# Altium PCB PMS.PcbDoc (part 2 of 2)
Units mil, origin at the board's own origin, x right, y up, seen from the top; angles counter-clockwise.
Board outline 4750 x 3250 mil, 4 copper layers (Top Layer, Layer 1, Layer 2, Bottom Layer), stack 23.756 mil thick; 171 components, 112 nets, 581 pads, 159 vias.
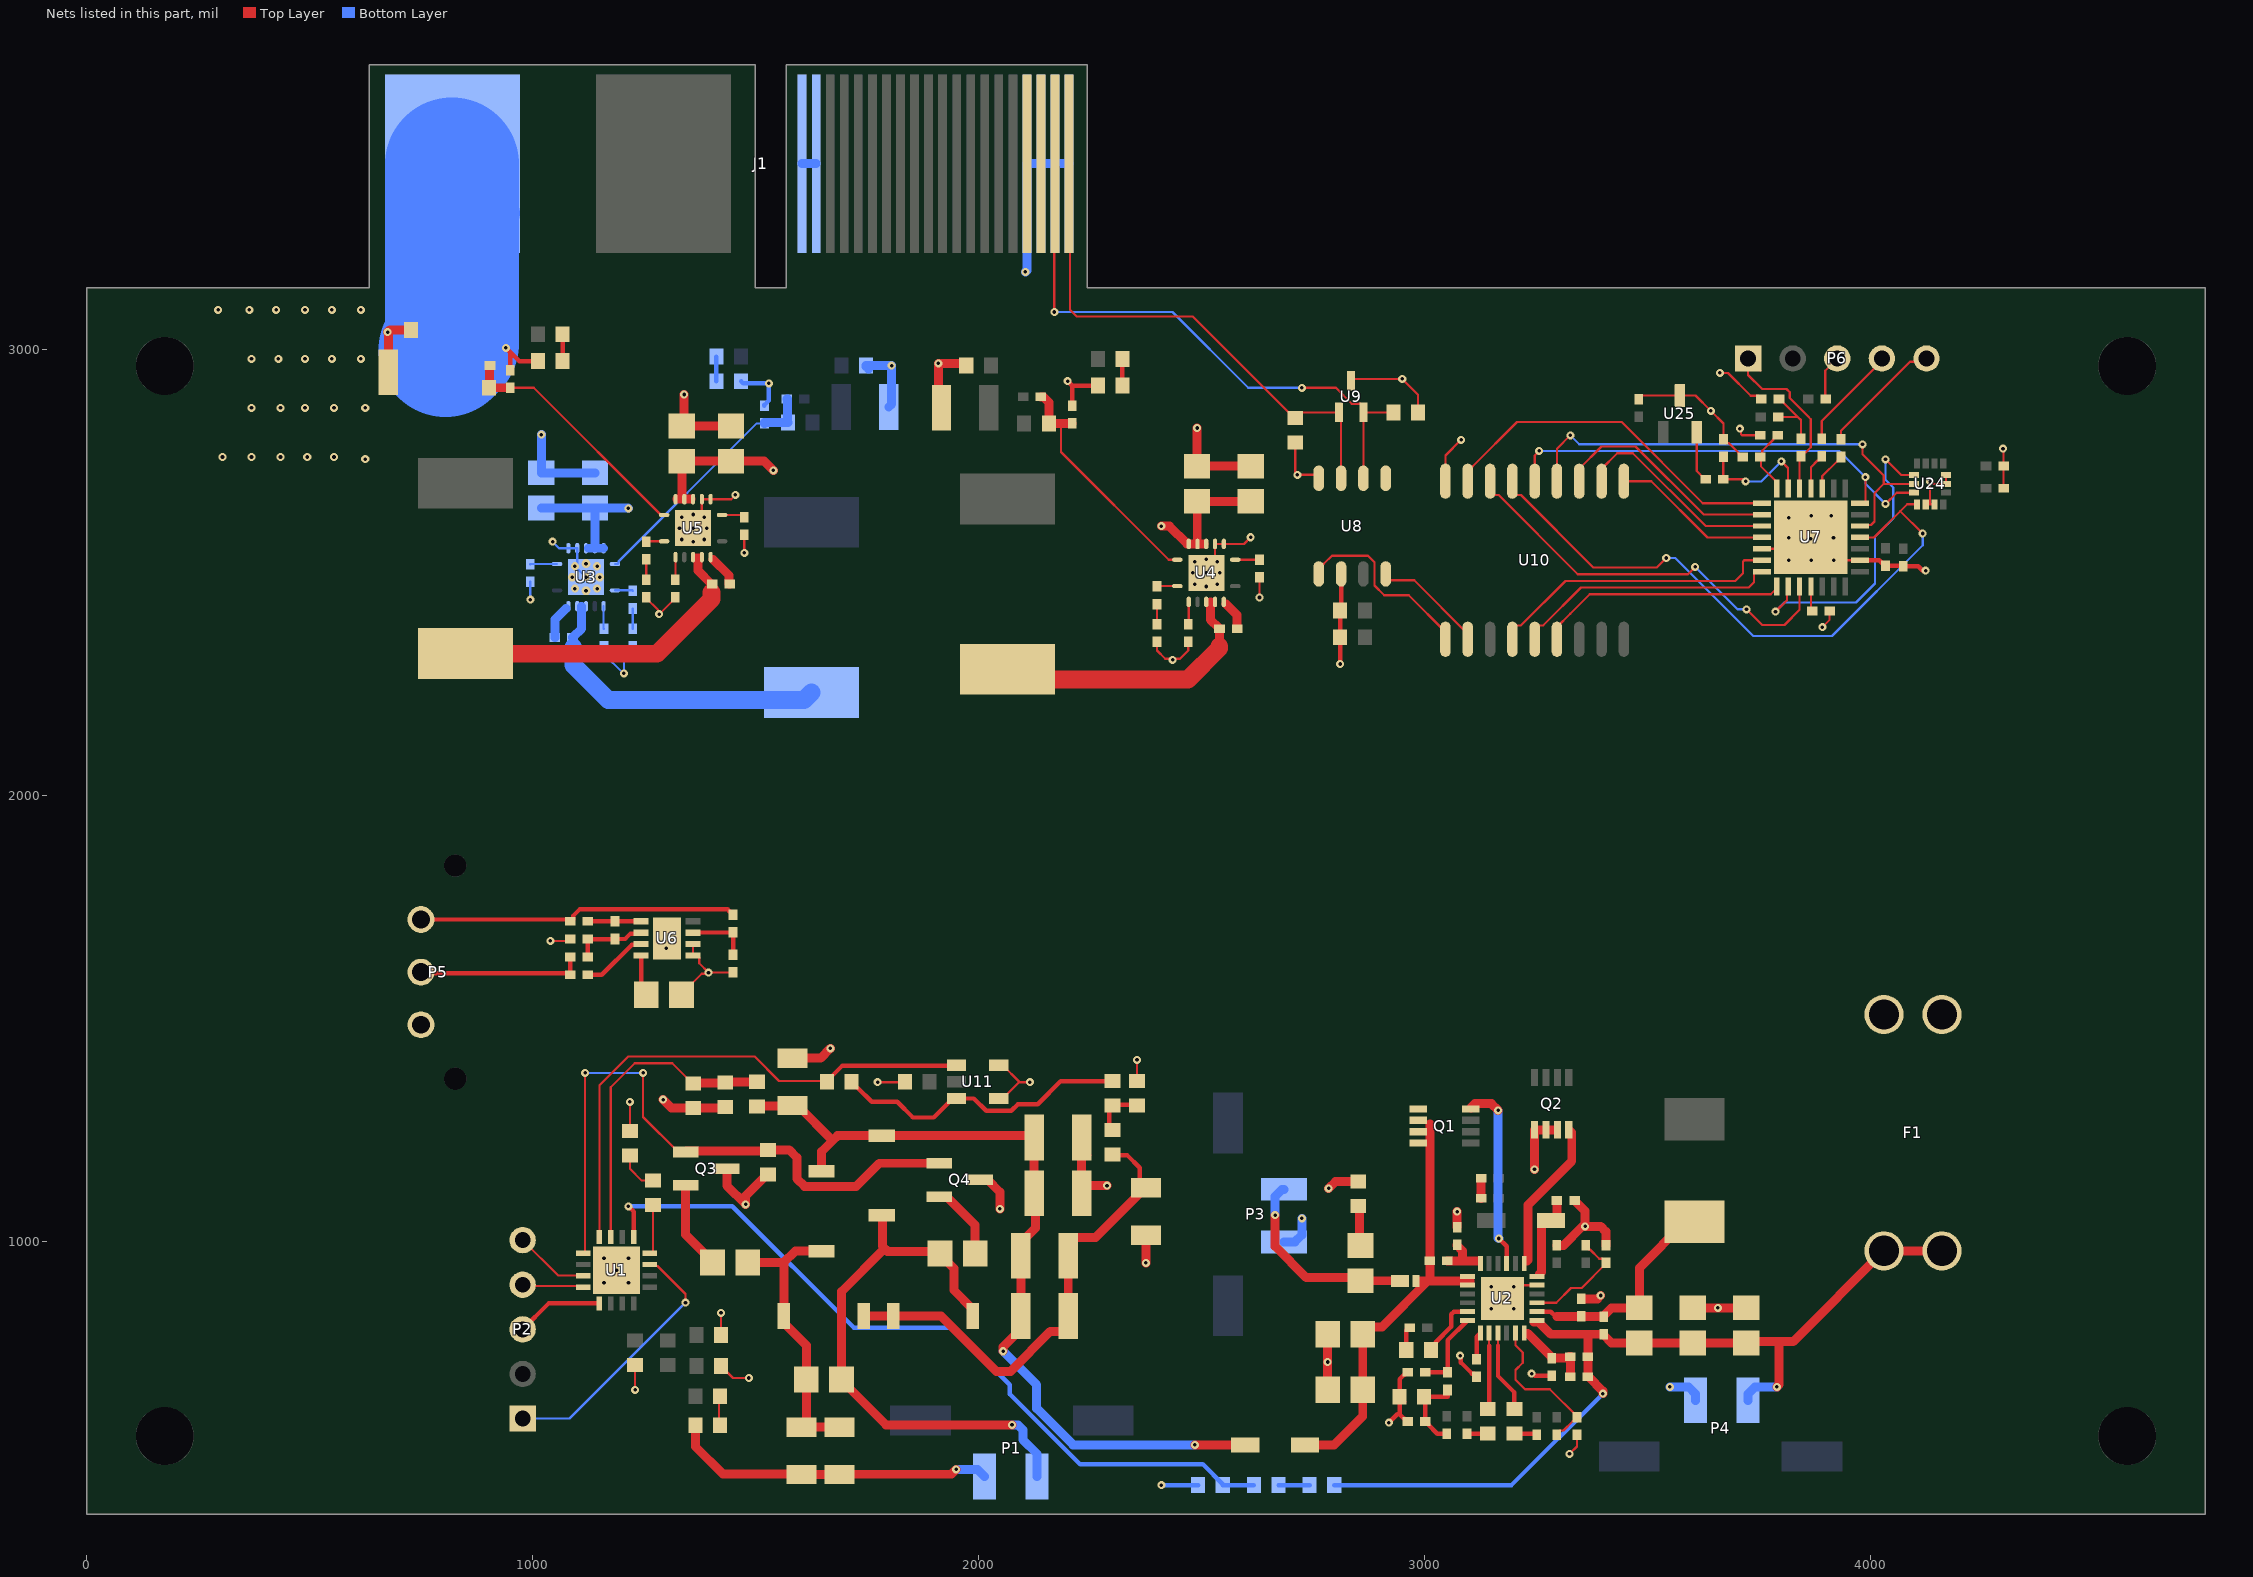
[diagram p4: the nets of this part, all layers, seen from the top]

## Via types
v1: diameter 18, hole 8, Top Layer to Bottom Layer, tented both sides, 159 vias

## Nets (pads, with @x,y where several pads share a name; then routed paths per layer and width w, separated by ;. In a path a pad name is that pad's centre, name@x,y a point inside that pad or via, vN(x,y) a via of type N, cw(c..) or ccw(c..) an arc to the next point about the centre after c; other vN are vias at no path point) (continued)
GND: C1.1 C2.1 C7.1 C8.1 C9.1 C14.1 C15.1 C16.1 C17.1 C24.1 C25.1 C26.1 C27.1 C28.1 C29.2 C30.2 C31.1 C32.1 C33.1 C36.2 C38.1 C39.1 C41.1 C42.1 C43.1 C45.1 C46.1 C48.1 C49.1 C50.1 C52.1 C53.1 C55.1 C56.1 C57.1 C58.1 C60.1 C61.2 C62.1 C63.1 C64.1 C65.1 C66.1 C67.1 C70.1 C71.2 C72.1 C76.1 C165.1 C166.1 C167.2 C168.2 D1.2 D2.2 D3.2 D14.2 J1.22 J1.40 J1.41 J1.42 J1.43 P2.3 P3.1 P4.2 P5.1 P6.3 Q2.1 Q2.2 Q2.3 Q3.3 Q4.3 R5.1 R6.1 R7.1 R11.1 R12.1 R19.1 R22.1 R26.1 R32.1 R33.1 R36.1 R37.1 R40.1 R41.1 R44.1 R56.1 R57.1 RT1.2 U1.13 U1.17 U2.17 U2.25 U3.2 U3.3 U3.15 U3.16 U3.17 U3.18 U3.19 U4.2 U4.3 U4.15 U4.16 U4.17 U4.18 U4.19 U5.2 U5.3 U5.15 U5.16 U5.17 U5.18 U5.19 U6.5 U6.6 U6.9 U7.5 U7.16 U7.29 U8.2 U8.8 U9.3 U10.18 U11.4 U11.5 U24.2 U24.3 U24.6 U24.7 U25.3 | length 8409.6
  Top Layer w5: v1(1040,1675) 1080.98,1675 C60.1@1084.98,1679 ; D14.2@1218.42,1249.26 v1(1218.42,1314.14) ; v1(1230.07,668.44) C17.1@1230.07,724.14 ; C57.1@1255,2445.32 1255,2443.35 1281.65,2416.69 1281.65,2409.97 v1(1284.14,2407.49) 1320,2443.35 C53.1@1320,2445.32 ; C62.1@1334.03,1554 1334.03,1555.97 1379.58,1601.51 1392.17,1601.51 v1(1394.66,1604) ; U6.6@1359.66,1667.82 U6.5@1359.66,1642.23 1369.5,1642.23 1373.89,1637.84 1373.89,1624.77 v1(1394.66,1604) ; v1(1360.04,2600.47) 1379.72,2620.16 U5.3@1379.72,2665.43 U5.2@1399.41,2665.43 1445.43,2665.43 v1(1455,2675) ; C14.1@1422.62,721.7 1449.32,695 v1(1485,695) ; R12.1@1422.62,791.7 v1(1422.62,840.88) ; C9.1@1430.71,1300.64 C9.1@1432.21,1302.14 ; C61.2@1449.66,1604.31 1449.35,1604 v1(1394.66,1604) ; v1(1475,2545) R41.1@1475,2585.32 ; v1(1773.9,1358.2) 1835.44,1358.2 C15.1@1835.44,1359.1 ; Q4.3@2004.26,1139.1 Q4.3@2020.99,1139.1 ; U11.4@2045.24,1321.7 2054.1,1321.7 2090.6,1358.2 ; U11.5@2045.24,1396.5 2054.1,1396.5 2090.6,1360 2090.6,1358.2 ; v1(2115.31,1358.2) 2090.6,1358.2 ; C7.1@2231.15,1109.1 2231.15,1116.28 C7.1@2231.15,1137.83 ; C8.1@2231.15,1234.1 2231.15,1213.69 C8.1@2250.3,1194.54 ; C16.1@2355.31,1360.76 v1(2355.31,1408.2) ; C50.1@2400,2345.32 2400,2326 2418.52,2307.49 2432.51,2307.49 v1(2435,2305) 2437.49,2307.49 2451.48,2307.49 2470,2326 C46.1@2470,2345.32 ; v1(2510.63,2500.04) 2530.32,2519.73 U4.3@2530.32,2565 U4.2@2550,2565 2595,2565 v1(2610,2580) ; v1(2630,2445) R37.1@2630,2490.32 ; C58.1@2710,2792.44 2710,2725 v1(2715,2720) 2755.22,2720 U8.8@2762.94,2712.28 ; v1@2810,2295 v1(2810.89,2295.89) ; C72.1@2810.89,2415.78 C72.1@2812.94,2417.84 ; U9.3@2835.5,2930.87 2839.63,2935 v1(2950,2935) 2985.5,2899.5 C67.1@2985.5,2860 ; U10.18@3046.91,2705.65 3046.91,2763.49 v1(3081.91,2798.49) ; U2.25@3174.33,873.58 3203.86,903.11 U2.17@3252.09,903.11 ; v1(3325,525) 3341.58,541.58 R26.1@3341.58,568.11 ; C168.2@3480.1,2889.95 3480.1,2890.59 3487.44,2897.94 U25.3@3572.7,2897.94 3607.46,2897.94 v1(3641.91,2863.49) 3670.1,2835.3 C167.2@3670.1,2799.95 3670.1,2797.98 3677.44,2790.63 3682.86,2790.63 3704.51,2768.98 3704.51,2767.01 3711.85,2759.67 R56.1@3713.82,2759.67 ; v1(3661.91,2948.49) 3680.14,2948.49 3731.29,2897.34 3747.97,2897.34 C63.1@3755.32,2890 ; U7.5@3756.32,2554.08 3840.73,2554.08 3864.63,2577.98 3865.69,2576.91 v1(3866.11,2576.91) 3869.07,2576.91 v1(3917.5,2528.49) U7.16@3976.32,2528.49 ; v1(3891.91,2378.49) 3908.19,2394.77 C64.1@3908.19,2414.67 ; C66.1@3899.68,2890 3898.19,2891.49 3898.19,2953.63 P6.3@3925.44,2980.88 ; C70.1@4028.93,2520.74 C70.1@4033.79,2515.88 ; C65.1@4073.5,2514.98 C65.1@4073.5,2515.88 ; U24.2@4123.66,2653.9 4133.51,2653.9 ; U24.3@4143.35,2653.9 4133.51,2653.9 ; U24.7@4169.43,2719.35 U24.6@4169.43,2699.67 4142.02,2699.67 4137.02,2704.67 v1(4133.51,2704.67) 4133.51,2653.9 ; v1(4296.91,2778.49) 4298.19,2777.21 C166.1@4298.19,2739.67 C165.1@4298.19,2689.67
  Top Layer w10: v1(940.34,3004.66) 950,2995 ; R44.1@950,2954.68 950,2995 ; P2.3@978,804.1 1036.1,862.2 U1.13@1150.03,862.2 ; D3.2@1012.44,2975 970,2975 950,2995 ; v1(2200,2930) 2210,2920 ; R40.1@2210,2874.68 2210,2920 ; D1.2@2267.44,2920 2210,2920 ; v1(2810.89,2295.89) C71.2@2810.89,2355.78 C72.1@2810.89,2415.78 ; C72.1@2812.94,2417.84 U8.2@2812.94,2497.72 ; v1(2920,595) 2938.7,613.7 2944.02,613.7 ; RT1.2@2954.77,642.04 RT1.2@2944.02,652.79 ; R22.1@2961.89,597.79 2959.92,597.79 2944.02,613.7 ; C24.1@2961.89,707.79 2959.92,707.79 2944.02,691.88 RT1.2@2944.02,652.79 ; v1(3080,745) 3081.53,743.47 3081.53,729.66 3106.27,704.92 3111.73,704.92 3116.58,700.07 C31.1@3116.58,698.11 ; v1(3240,705) 3242.16,705 3247.09,700.07 3284.76,700.07 R32.1@3285,700.32 ; U7.16@3976.32,2528.49 3976.37,2528.44 4019.48,2528.44 4027.18,2520.74 C70.1@4028.93,2520.74 ; C70.1@4033.79,2515.88 C65.1@4073.5,2515.88 ; C65.1@4073.5,2514.98 4106.9,2514.98 4116.88,2505 v1(4123.44,2505) ; 2944.02,613.7 RT1.2@2944.02,652.79
  Top Layer w20: C52.1@676.85,2950 676.85,3038.15 v1(675,3040) 680,3045 C2.1@727.44,3045 ; v1(1293,1319.1) 1311.46,1300.64 R6.1@1360.31,1300.64 C9.1@1430.71,1300.64 ; v1(1340,2900) 1340,2834.37 C56.1@1335,2829.37 C55.1@1445,2829.37 ; Q3.3@1435.94,1164.3 1435.94,1126.16 v1(1478,1084.1) 1478,1103.51 1526.03,1151.54 R11.1@1528,1151.54 ; R5.1@1583,1412.25 1646.15,1412.25 v1(1668,1434.1) ; C45.1@1916.85,2870 1910,2876.85 v1(1910,2970) C76.1@1957.44,2970 ; C76.1@1967.44,2960 C76.1@1972.44,2965 ; Q4.3@2020.99,1139.1 2048,1112.09 v1(2048,1074.1) ; C7.1@2231.15,1116.28 2241.23,1126.36 v1(2288,1126.36) ; C7.1@2231.15,1137.83 C8.1@2231.15,1213.69 ; v1(2375.31,953.2) R7.1@2375.31,1015.05 ; v1(2490,2825) C49.1@2490,2739.37 C48.1@2610,2739.37 ; C27.1@2782.66,668.44 v1(2782.66,730.94) C26.1@2782.66,793.44 ; v1(2785,1120) 2800.35,1135.35 C28.1@2851.58,1135.35 ; C29.2@3073.19,1033.14 v1(3073.19,1068.19) ; v1(3246.58,1162.79) Q2.1@3246.61,1251.25 Q2.1@3246.61,1251.25 Q2.2@3272.2,1251.25 Q2.3@3295.39,1251.25 ; C30.2@3296.58,992.48 3311.64,992.48 3354.16,1035 v1(3360,1035) ; C25.1@3336.26,1092.79 3337.92,1092.79 3338.07,1092.63 3338.07,1090.98 3360,1069.05 v1(3360,1035) ; C36.2@3351.58,872.48 3387.48,872.48 v1(3395,880) ; R19.1@3406.58,992.48 3406.42,992.63 3406.42,1023.28 3394.7,1035 v1(3360,1035) ; C32.1@3601.58,852.16 v1(3657.84,852.16) C33.1@3721.58,852.16
  Bottom Layer w5: v1(995,2440) R33.1@995,2480.32 ; v1(1045,2570) 1059.57,2555.43 U3.2@1080.59,2555.43 U3.3@1100.28,2555.43 1100.28,2510.16 v1(1119.96,2490.47) ; C39.1@1160,2335.32 1160,2318.35 1202.39,2275.96 1204.04,2275.96 v1(1205,2275) 1205,2313.35 1225,2333.35 C43.1@1225,2335.32
  Bottom Layer w10: D2.2@1467.56,2930 1472.56,2925 v1(1530,2925) 1530,2915 1530,2886.65 1520,2876.65 R36.1@1520,2874.68 ; v1(2410,455) R57.1@2492.44,455
  Bottom Layer w20: v1(1020,2810) C41.1@1020,2724.37 C42.1@1140,2724.37 ; C1.1@1747.56,2965 1747.56,2963.03 C1.1@1753.31,2957.28 ; C1.1@1748.54,2964.02 1749.53,2965 v1(1805,2965) 1805,2878.22 C38.1@1798.79,2872.01 ; v1(2105,3175) 2108.5,3178.5 J1.40@2108.5,3417.75 ; J1.40@2108.66,3417.59 J1.40@2108.5,3417.75 ; J1.43@2203,3417.75 J1.42@2171.5,3417.75 J1.41@2140,3417.75 J1.40@2108.5,3417.75 ; P3.1@2685,1000 2709.41,1000 2725,1015.59 v1(2725,1053.11) ; v1(3550,675) 3591.81,675 3607.4,659.41 P4.2@3607.4,645
  Bottom Layer w80: J1.22@770,3366.75 819.5,3416.25 J1.22@821,3417.75 J1.22@932.5,3306.25
  Bottom Layer w300: 805,3000 819.5,3014.5 J1.22@819.5,3416.25
  other v1: 3150,850 3200,850 3150,900 3200,900 1160.31,908.2 1215.31,908.2 1188.42,936.7 1160.31,963.2 1215.31,963.2 1299.66,1659 1095,2465 1145,2465 2485,2475 2535,2475 1095,2515 1145,2515 2485,2525 2535,2525 3816.91,2528.49 3866.91,2528.49 1335,2575 1385,2575 3816.91,2578.49 3916.91,2578.49 3816.91,2623.49 1335,2625 1385,2625 3866.91,2628.49 3911.91,2628.49 625,2755 305,2760 370,2760 435,2760 495,2760 555,2760 370,2870 435,2870 490,2870 555,2870 625,2870 370,2980 430,2980 490,2980 550,2980 615,2980 295,3090 365,3090 425,3090 490,3090 550,3090 615,3090
ICLK: P2.5 U1.11 | length 169.1
  Top Layer w5: P2.5@978,1004.1 1057.5,924.6 1113.22,924.6 U1.11@1113.92,923.9
IDAT: P2.4 U1.12 | length 138.3
  Top Layer w5: P2.4@978,904.1 980.89,901.2 1111.03,901.2 U1.12@1113.92,898.31
IOUT: R8.1 U1.8 U11.1 | length 1206.6
  Top Layer w5: U1.8@1150.03,1011.2 1150.03,1351.13 1214.5,1415.6 1498.22,1415.6 1552.75,1361.07 R8.1@1660.44,1361.07
  Top Layer w10: R8.1@1660.44,1359.1 1660.44,1361.07 1694.97,1395.6 1949.85,1395.6 U11.1@1950.76,1396.5
ISET1: R26.2 R27.1 U2.11 | length 355.2
  Top Layer w5: U2.11@3203.87,795.82 3203.87,768.18 3220,752.05 3220,729.02 3203.87,712.89 3203.87,691.13 3225,670 3281.02,670 3341.58,609.44 R26.2@3341.58,607.48 3341.58,605.51 3334.23,598.16 3332.31,598.16 3311.56,577.42 3306.85,577.42 3303.92,577.42 3296.58,570.07 R27.1@3296.58,568.11
ISET2: R19.2 R20.1 U2.15 | length 256.3
  Top Layer w5: U2.15@3252.09,863.74 3295.17,863.74 3328.22,896.79 3352.23,896.79 3406.58,951.14 3406.58,955.07 3399.23,962.42 3391.95,962.42 3371.2,983.16 3368.92,983.16 3361.58,990.51 R20.1@3361.58,992.48
ISNS: C5.1 C6.1 D12.1 D13.1 R7.2 R14.2 | length 1086.6
  Top Layer w10: R14.2@2300.31,1195.64 2301.07,1194.88 2333.03,1194.88 2361.67,1166.25 2361.67,1123.18 2363.5,1121.35 R7.2@2363.8,1121.35
  Top Layer w20: D12.1@1742.5,834.1 D13.1@1808.5,834.1 1915.72,834.1 2039.81,710 2071.87,710 2161.21,799.34 2189.5,799.34 2201.15,810.99 C6.1@2201.15,969.1 2201.15,998.63 2212.8,1010.28 2262.43,1010.28 R7.2@2368.5,1116.35 ; R7.2@2363.8,1121.35 R7.2@2375.31,1121.35
MCLR: P6.1 R52.2 U7.26 | length 432.6
  Top Layer w5: P6.1@3752.47,2953.85 P6.1@3725.44,2980.88 3725.44,2943.85 3756.95,2912.34 3811.67,2912.34 3814.02,2910 3819,2905.02 3819,2891.99 3843.33,2867.66 3843.38,2867.66 3858.79,2852.25 3858.79,2852.19 3866.13,2844.85 3866.13,2781.61 3855.03,2770.5 3851.13,2770.5 3843.79,2763.16 R52.2@3843.79,2761.19 3840.73,2758.13 U7.26@3840.73,2689.67
MCLR2: P2.1 U1.3 | length 599.5
  Top Layer w5: U1.3@1262.92,949.49 1266.42,945.99 1280.51,945.99 1343,883.5 v1(1343,864.1)
  Bottom Layer w5: P2.1@978,604.1 1083,604.1 v1(1343,864.1)
MOD: Q3.1 Q4.1 R11.2 U1.9 | length 1416.5
  Top Layer w5: U1.9@1113.92,975.08 1114.5,975.08 1118,978.58 v1(1118,1379.1) ; v1(1248,1379.1) 1248,1280.38 1326.69,1201.7 Q3.1@1343.42,1201.7
  Top Layer w20: Q3.1@1343.42,1201.7 1345.23,1203.51 1524.85,1203.51 R11.2@1528,1206.66 1575.72,1206.66 1592.97,1189.41 1592.97,1141.85 1610.22,1124.6 1725.76,1124.6 1777.66,1176.5 Q4.1@1911.74,1176.5
  Bottom Layer w5: v1(1118,1379.1) v1(1248,1379.1)
NetC3_2: C3.2 C4.1 C10.2 C11.2 D4.1 D12.2 | length 655.9
  Top Layer w20: C11.2@1482.37,954.1 1563.76,954.1 ; D4.1@1648,979.6 1589.26,979.6 1563.76,954.1 ; C3.2@1688.42,584.85 C10.2@1603.42,584.85 1614.05,595.48 C4.1@1614.05,691.7 1614.05,768.05 1563.5,818.6 D12.2@1563.5,834.1 1563.76,834.36 1563.76,954.1
NetC4_2: C4.2 C12.2 D11.1 D13.2 P1.2 | length 1282.7
  Top Layer w20: D11.1@1783,1059.6 1784.47,1058.13 1784.47,990.7 1796.19,978.98 1903.51,978.98 1903.63,979.1 1908.63,979.1 C12.2@1913.63,974.1 1913.63,972.13 1944.81,940.95 1944.81,892.29 1987.5,849.6 D13.2@1987.5,834.1 ; 1789.54,985.63 1692.79,888.89 1692.79,689.73 1792.52,590 v1(2075,590)
  Bottom Layer w20: v1(2075,590) 2088.19,590 2099.27,578.92 2099.27,556.55 2131.22,524.61 2131.22,499.02 P1.2@2131.22,474.02
NetC11_1: C11.1 Q3.2 | length 197.7
  Top Layer w20: Q3.2@1343.42,1126.89 1343.42,1016.28 1403.63,956.07 C11.1@1403.63,954.1
NetC12_1: C12.1 Q4.2 | length 170.8
  Top Layer w20: Q4.2@1911.74,1101.7 1913.55,1099.89 1930.28,1099.89 1992.37,1037.8 C12.1@1992.37,974.1
NetC13_2: C13.2 R10.1 | length 67.1
  Top Layer w5: C13.2@1420.56,589.1 1418,591.66 1418,651.54 R10.1@1420.56,654.1
NetC16_2: C16.2 R13.2 R14.1 | length 117.7
  Top Layer w10: R14.1@2300.31,1250.76 2300.31,1254.54 2293.34,1261.5 2293.34,1298.67 2302.75,1308.08 2352.87,1308.08 C16.2@2355.31,1305.64
NetC23_1: C23.1 R18.2 | length 45
  Top Layer w20: R18.2@3126.89,1097.79 C23.1@3126.89,1142.79
NetC26_2: C26.2 C27.2 D9.2 D10.2 Q1.5 Q1.6 Q1.7 Q1.8 R29.2 U2.1 U2.2 | length 1004
  Top Layer w20: D9.2@2731.93,545 2797.48,545 2861.4,608.91 C27.2@2861.4,668.44 C26.2@2861.4,793.44 2877.63,809.68 2904.68,809.68 3007.79,912.79 ; D10.2@2986.25,912.79 3011.58,912.79 ; 3011.89,1265 R29.2@3011.89,957.79 3011.89,913.11 3011.58,912.79 ; 3101.58,912.79 3096.58,912.79 3011.58,912.79
NetC28_2: C28.2 R28.1 | length 90.1
  Top Layer w20: C28.2@2851.58,1080.23 2854.08,1077.73 2854.08,994.66 R28.1@2856.58,992.16
NetC29_1: C29.1 R29.1 U2.24 | length 108.2
  Top Layer w20: R29.1@3051.26,957.79 3084.96,957.79 ; C29.1@3073.19,993.77 3073.19,992.12 3084.96,980.36 3084.96,957.79 ; 3118.65,957.79 3084.96,957.79
NetC31_2: C31.2 U2.7 | length 60.9
  Top Layer w10: C31.2@3116.58,737.48 3116.58,787.48 U2.7@3124.29,795.18
NetC37_1: C37.1 U3.13 | length 75.9
  Bottom Layer w20: C37.1@1050.32,2355 1050.32,2395.23 1075.55,2420.47
NetC37_2: C37.2 L2.1 U3.11 U3.12 | length 714.4
  Bottom Layer w20: C37.2@1089.69,2355 C37.2@1091.34,2355 ; 1091.5,2333.5 1091.5,2354.84 C37.2@1091.34,2355 ; 1110,2425 1110,2375.31 1091.5,2356.81 1091.5,2355.16 C37.2@1091.34,2355
  Bottom Layer w40: 1091.5,2333.5 1091.5,2293.5 1170,2215 1608.76,2215 L2.1@1625.48,2231.72
NetC39_2: C39.2 U3.9 | length 51.1
  Bottom Layer w5: U3.9@1159.33,2425.51 1159.33,2375.35 C39.2@1160,2374.69
NetC41_2: C41.2 C42.2 C48.2 C49.2 C55.2 C56.2 F1.3 F1.4 R55.2 U3.4 U3.5 U3.6 U4.4 U4.5 U4.6 U5.4 U5.5 U5.6 | length 1024.2
  Top Layer w5: v1(3706.91,2823.49) 3709.4,2821 3709.4,2811 3711.91,2808.49 R55.2@3752.22,2808.49
  Top Layer w20: U5.6@1324.13,2665.43 U5.5@1340.35,2665.43 1355,2665.43 ; 1335,2676.3 C56.2@1335,2750.63 1519.37,2750.63 v1(1540,2730) ; v1(2410,2605) 2427.8,2605 2467.8,2565 U4.6@2471.26,2565 U4.5@2490.94,2565 ; 2505.59,2565 U4.5@2490.94,2565 ; C48.2@2610,2660.63 C49.2@2490,2660.63 2490.47,2660.16 2490.47,2565.47 U4.5@2490.94,2565
  Bottom Layer w20: C41.2@1020,2645.63 C42.2@1140,2645.63 ; 1125,2555.43 U3.5@1139.65,2555.43 ; U3.6@1159.33,2555.43 U3.5@1139.65,2555.43 ; v1(1215,2645) 1214.37,2645.63 C42.2@1140,2645.63 ; U3.5@1139.65,2555.43 1139.82,2555.61 1139.82,2645.45 C42.2@1140,2645.63
NetC43_2: C43.2 R35.1 | length 45.6
  Bottom Layer w5: C43.2@1225,2374.69 R35.1@1225,2420.32
NetC44_1: C44.1 U4.13 | length 65.2
  Top Layer w20: 2555.04,2430.04 2579.68,2405.39 C44.1@2579.68,2375
NetC44_2: C44.2 L3.1 U4.11 U4.12 | length 625.4
  Top Layer w20: 2520,2435 2520,2395.31 2538.5,2376.81 2538.5,2375.16 C44.2@2538.66,2375 ; 2539.85,2334.85 2539.85,2374.84 2540.01,2375 C44.2@2540.31,2375
  Top Layer w40: L3.1@2065,2284 2088,2261 2469.76,2261 2539.85,2331.08 2539.85,2334.85
NetC46_2: C46.2 U4.9 | length 51.2
  Top Layer w5: C46.2@2470,2384.69 2470.16,2384.53 2471.26,2385.63 U4.9@2471.26,2435.08
NetC50_2: C50.2 R39.1 | length 45.6
  Top Layer w5: C50.2@2400,2384.69 R39.1@2400,2430.32
NetC51_1: C51.1 U5.13 | length 80.4
  Top Layer w5: U5.13@1399.41,2535.51 1399.41,2530.38 U5.13@1401.46,2528.32 ; C51.1@1442.27,2475.13 C51.1@1442.4,2475
  Top Layer w20: 1404.45,2530.47 1440.59,2494.32 1440.59,2475.16 1440.75,2475 C51.1@1442.4,2475
NetC51_2: C51.2 L4.1 U5.11 U5.12 | length 731.5
  Top Layer w7: U5.11@1360.04,2535.51 1360.04,2538.51 1361.17,2539.64 1375.59,2539.64 U5.12@1379.72,2535.51
  Top Layer w20: 1371.12,2531.95 1371.12,2505.26 C51.2@1401.22,2475.16 ; 1401.22,2456.22 1401.22,2474.84 1401.38,2475 C51.2@1403.03,2475
  Top Layer w40: L4.1@850,2319 1279,2319 1401.22,2441.22 1401.22,2456.22
NetC53_2: C53.2 U5.9 | length 51.1
  Top Layer w5: C53.2@1320,2484.69 1320.67,2485.35 U5.9@1320.67,2535.51
NetC57_2: C57.2 R43.1 | length 45.6
  Top Layer w5: C57.2@1255,2484.69 R43.1@1255,2530.32
NetC58_2: C58.2 J1.21 U8.7 U9.1 | length 1186.9
  Top Layer w5: J1.21@2203,3417.75 2205,3415.75 2205,3090 2220,3075 2480.59,3075 2708.03,2847.56 C58.2@2710,2847.56 2722.44,2860 U9.1@2807.94,2860 2812.94,2855 U8.7@2812.94,2712.28
NetC59_1: C59.1 R47.2 U6.1 | length 119.4
  Top Layer w10: R47.2@1124.35,1719 1124.5,1718.84 1184.5,1718.84 C59.1@1184.66,1718.68 1184.82,1718.84 1243.36,1718.84 U6.1@1243.52,1719
NetC59_2: C59.2 C60.2 R48.2 U6.2 | length 165.1
  Top Layer w10: R48.2@1124.35,1639 C60.2@1124.35,1679 1124.5,1679.16 1184.5,1679.16 C59.2@1184.66,1679.31 1207.49,1679.31 1219.69,1691.52 1241.63,1691.52 U6.2@1243.52,1693.41
NetC61_1: C61.1 R46.2 U6.7 | length 141
  Top Layer w10: U6.7@1359.66,1693.41 1360.11,1693.86 1449.21,1693.86 R46.2@1449.66,1694.31 C61.1@1449.66,1643.68
NetC62_2: C62.2 U6.4 | length 93.1
  Top Layer w10: U6.4@1243.52,1642.23 1243.52,1565.77 C62.2@1255.29,1554
NetC63_2: C63.2 R51.1 R52.1 | length 154.7
  Top Layer w5: R51.1@3793.19,2849.67 3836.98,2849.67 ; C63.2@3794.69,2890 3796.65,2890 3836.98,2849.67 ; R52.1@3843.79,2800.56 3843.79,2842.86 3836.98,2849.67
NetC64_2: C64.2 U7.11 | length 56
  Top Layer w5: U7.11@3866.32,2469.67 3866.32,2417.17 C64.2@3868.82,2414.67
NetC67_2: C67.2 J1.20 U8.6 U9.2 | length 1352.7
  Top Layer w5: v1(2170,3085) 2170,3416.25 J1.20@2171.5,3417.75 J1.20@2178.84,3410.41 ; v1(2725,2915) 2801.37,2915 2836.99,2879.37 2856.69,2879.37 2863.06,2873 U9.2@2863.06,2860 ; U8.6@2862.94,2712.28 2862.94,2859.88 U9.2@2863.06,2860 ; C67.2@2930.38,2860 U9.2@2863.06,2860
  Bottom Layer w5: v1(2170,3085) 2435,3085 2605,2915 v1(2725,2915)
NetC167_1: C167.1 R45.2 U7.27 | length 268.3
  Top Layer w5: C167.1@3670.1,2760.58 3669.79,2760.26 R45.2@3669.79,2710.26 3715.1,2710.26 v1(3720.1,2705.26) ; v1(3800.1,2750.26) 3815.14,2735.22 U7.27@3815.14,2689.67
  Bottom Layer w5: v1(3720.1,2705.26) 3755.1,2705.26 v1(3800.1,2750.26)
NetD1_1: D1.1 R1.1 | length 60
  Top Layer w10: D1.1@2322.56,2920 R1.1@2322.56,2980
NetD2_1: D2.1 R2.1 | length 55
  Bottom Layer w10: D2.1@1412.44,2930 R2.1@1412.44,2985
NetD3_1: D3.1 R3.1 | length 60
  Top Layer w10: D3.1@1067.56,2975 R3.1@1067.56,3035
NetD5_1: D5.1 R23.2 | length 54.4
  Top Layer w10: D5.1@2959.02,757.79 2959.02,801.88 2964.92,807.79 R23.2@2966.89,807.79
NetD6_1: D6.1 R24.2 | length 50.9
  Top Layer w5: R24.2@3249.45,570.23 R24.2@3251.58,568.11
  Top Layer w10: D6.1@3201.58,570.23 R24.2@3249.45,570.23
NetD7_1: D7.1 R25.2 | length 48.4
  Top Layer w5: D7.1@3139.45,568.11 D7.1@3141.58,570.23
  Top Layer w10: R25.2@3095,570.31 3137.24,570.31 D7.1@3139.45,568.11
NetD10_1: D10.1 P3.2 R28.2 | length 451
  Top Layer w20: v1(2665,1060) 2665,990 2735,920 2850,920 R28.2@2856.58,913.42 2856.89,913.11 2944.71,913.11 D10.1@2945.02,912.79
  Bottom Layer w20: v1(2665,1060) 2665,1102.52 2680.59,1118.11 P3.2@2685,1118.11
NetD14_1: D14.1 R15.1 | length 92.7
  Top Layer w5: D14.1@1218.42,1194.14 1218.42,1163.92 1244.78,1137.56 R15.1@1270,1137.56
NetJ1_18: J1.18
NetJ1_19: J1.19
NetJ1_24: J1.24 J1.25 | length 31.5
  Bottom Layer w20: J1.24@1604.5,3417.75 J1.25@1636,3417.75
NetP5_2: P5.2 R48.1 R50.1 | length 377.5
  Top Layer w10: P5.2@750,1605 753,1602 1081.98,1602 R50.1@1084.98,1599 R48.1@1084.98,1639
NetP5_3: P5.3 R46.1 R47.1 | length 721.7
  Top Layer w10: P5.3@750,1723 1080.98,1723 R47.1@1084.98,1719 ; R47.1@1084.66,1723 1090.94,1723 1091.79,1723.84 1091.79,1731.79 1105.5,1745.5 1437.46,1745.5 1442.46,1740.5 1444.82,1740.5 1449.66,1735.65 R46.1@1449.66,1733.68
NetP6_4: P6.4 R54.1 | length 236.2
  Top Layer w5: R54.1@3890.44,2800.56 3890.44,2840.44 4025.44,2975.44 P6.4@4025.44,2980.88
NetP6_5: P6.5 R53.1 | length 278.4
  Top Layer w5: R53.1@3933.51,2799.35 3933.51,2818.67 4088.41,2973.57 4118.13,2973.57 P6.5@4125.44,2980.88
NetQ1_4: Q1.4 U2.21 | length 423.1
  Top Layer w5: U2.21@3184.18,951.33 U2.21@3184.48,951.64
  Top Layer w10: v1(3166.58,1007.79) 3184.17,990.2 3184.17,951.95 U2.21@3184.48,951.64
  Top Layer w20: Q1.4@3103.75,1300.8 3112.95,1310 3150,1310 v1(3165,1295)
  Bottom Layer w20: v1(3165,1295) 3165,1009.37 v1(3166.58,1007.79)
NetQ2_4: Q2.4 U2.19 | length 334.8
  Top Layer w20: 3229.38,957.16 3231.58,959.35 3231.58,1082.79 3330,1181.21 3330,1245.14 Q2.4@3326.38,1248.76
NetR8_2: R8.2 R13.1 U11.3 | length 675.9
  Top Layer w10: R8.2@1715.56,1359.1 1715.56,1357.13 1726.31,1346.38 1728.28,1346.38 1760.56,1314.1 1818,1314.1 1853,1279.1 1899.3,1279.1 1941.9,1321.7 1989.58,1321.7 2017.38,1293.9 2073.11,1293.9 2088.31,1309.1 2133,1309.1 2184.66,1360.76 R13.1@2300.31,1360.76
NetR15_2: R15.2 U1.4 | length 112.4
  Top Layer w5: U1.4@1262.92,975.08 1266.5,975.08 1270,978.58 R15.2@1270,1082.44
NetR16_1: R16.1 R49.2 | length 69.9
  Bottom Layer w10: R49.2@2672.56,455 R16.1@2742.44,455
NetR17_1: R17.1 R21.1 R22.2 RT1.1 | length 183.4
  Top Layer w10: RT1.1@3003.82,648.11 RT1.1@3001.26,650.66 ; R17.1@3050,570.32 3028.74,570.32 3008.07,590.98 3008.07,592.95 3003.39,597.63 3001.42,597.63 R22.2@3001.26,597.79 RT1.1@3001.26,650.66 ; R21.1@3051.58,662.79 3051.58,652.79 RT1.1@2999.14,652.79 RT1.1@3001.26,650.66 ; R21.1@3051.58,668.11 R21.1@3051.73,667.95
NetR33_2: R33.2 U3.1 | length 60.1
  Bottom Layer w5: R33.2@995,2519.69 995.32,2520 U3.1@1055,2520
NetR35_2: R35.2 U3.8 | length 40.6
  Bottom Layer w5: U3.8@1184.92,2460.94 1223.74,2460.94 R35.2@1225,2459.69
NetR37_2: R37.2 U4.1 | length 54.5
  Top Layer w5: U4.1@2575.59,2529.57 2629.89,2529.57 R37.2@2630,2529.69
NetR39_2: R39.2 U4.8 | length 46
  Top Layer w5: R39.2@2400,2469.69 2400.83,2470.51 U4.8@2445.67,2470.51
NetR41_2: R41.2 U5.1 | length 52.2
  Top Layer w5: U5.1@1425,2630 1469.68,2630 R41.2@1475,2624.69
NetR43_2: R43.2 U5.8 | length 40.6
  Top Layer w5: R43.2@1255,2569.69 1256.26,2570.94 U5.8@1295.08,2570.94
NetR45_1: R45.1 U25.2 | length 114.6
  Top Layer w5: U25.2@3610.1,2815.26 3610.1,2728.61 3628.45,2710.26 R45.1@3630.42,2710.26
NetR50_2: R50.2 U6.3 | length 147.7
  Top Layer w10: R50.2@1124.35,1599 1155.46,1599 1222.38,1665.93 1241.63,1665.93 U6.3@1243.52,1667.82
NetU7_1: U7.1 U10.17 | length 803
  Top Layer w5: U10.17@3096.91,2705.65 3096.91,2728.17 3108.08,2739.35 3207.22,2838.49 3441.91,2838.49 3623.96,2656.44 U7.1@3756.32,2656.44
NetU7_2: U7.2 U10.12 | length 521.2
  Top Layer w5: U10.12@3346.91,2705.65 3346.91,2733.49 3396.91,2783.49 3473.17,2783.49 3625.81,2630.85 U7.2@3756.32,2630.85
NetU7_3: U7.3 U10.11 | length 469.2
  Top Layer w5: U10.11@3396.91,2705.65 3396.91,2733.21 3432.18,2768.49 3466.95,2768.49 3630.18,2605.26 U7.3@3756.32,2605.26
NetU7_4: U7.4 U10.10 | length 361.6
  Top Layer w5: U10.10@3446.91,2705.65 3508.58,2705.65 3634.56,2579.67 U7.4@3756.32,2579.67
NetU7_6: U7.6 U10.4 | length 665.5
  Top Layer w5: U10.4@3196.91,2351.32 3196.91,2373.84 3205.51,2382.45 3216.09,2382.45 3315.82,2482.17 3696.91,2482.17 3714.03,2499.29 3714.03,2525.56 3716.95,2528.49 U7.6@3756.32,2528.49 U7.6@3753.39,2531.42
NetU7_7: U7.7 U10.5 | length 597.3
  Top Layer w5: U10.5@3246.91,2351.32 3246.91,2373.84 3255.51,2382.45 3266.09,2382.45 3350.82,2467.17 3726.91,2467.17 3738.82,2479.08 3738.82,2499.4 3742.32,2502.9 U7.7@3756.32,2502.9
NetU7_8: U7.8 U10.6 | length 560.4
  Top Layer w5: U10.6@3296.91,2351.32 3296.91,2378.88 3326.52,2408.49 3326.91,2408.49 3370.59,2452.17 3776.42,2452.17 3789.55,2465.29 U7.8@3789.55,2469.67
NetU7_9: U7.9 U24.12 | length 698.5
  Top Layer w5: v1(3786.91,2413.42) 3812.48,2438.99 3812.48,2467.01 U7.9@3815.14,2469.67 ; v1(4033.51,2754.67) 4068.82,2719.35 U24.12@4097.58,2719.35
  Bottom Layer w5: v1(3786.91,2413.42) 3806.98,2433.49 3967.32,2433.49 4010.1,2476.27 4010.1,2581.27 4051.01,2622.17 4051.01,2691.62 4033.51,2709.12 v1(4033.51,2754.67)
NetU7_10: U7.10 U10.16 | length 920.3
  Top Layer w5: U10.16@3146.91,2705.65 3146.91,2683.13 3155.51,2674.53 3166.09,2674.53 3343.45,2497.17 3590.59,2497.17 v1(3606.91,2513.49) ; v1(3721.91,2418.49) 3756.91,2383.49 3806.91,2383.49 3840.73,2417.31 U7.10@3840.73,2469.67
  Bottom Layer w5: v1(3606.91,2513.49) 3701.91,2418.49 v1(3721.91,2418.49)
NetU7_18: U7.18 U10.15 U24.1 | length 1434.8
  Top Layer w5: U10.15@3196.91,2705.65 3196.91,2683.13 3205.51,2674.53 3216.09,2674.53 3378.45,2512.17 3520.59,2512.17 v1(3541.91,2533.49) ; U7.18@3976.32,2579.67 4007.84,2579.67 4066.78,2638.62 ; U24.1@4103.98,2653.9 4082.07,2653.9 4066.78,2638.62 ; v1(4116.91,2588.49) 4066.78,2638.62
  Bottom Layer w5: v1(3541.91,2533.49) 3562.16,2533.49 3737.16,2358.49 3913.54,2358.49 4116.91,2561.86 v1(4116.91,2588.49)
NetU7_19: U7.19 U10.13 U24.13 | length 1084.7
  Top Layer w5: U10.13@3296.91,2705.65 3296.91,2778.49 v1(3326.91,2808.49) ; U7.19@3976.32,2605.26 3978.38,2607.32 4000.86,2607.32 4008.82,2615.28 4008.82,2678.67 4029.81,2699.67 ; v1(3981.91,2788.49) 3981.91,2766.27 4029.81,2718.37 4029.81,2699.67 ; U24.13@4097.58,2699.67 4029.81,2699.67
  Bottom Layer w5: v1(3326.91,2808.49) 3346.91,2788.49 v1(3981.91,2788.49)
NetU7_21: U7.21 U10.14 U24.14 | length 1049.5
  Top Layer w5: U10.14@3246.91,2705.65 3246.91,2763.49 v1(3256.91,2773.49) ; U7.21@3976.32,2656.44 3985.01,2656.44 3988.51,2659.94 v1(3988.51,2714.67) ; v1(4033.51,2654.67) 4058.82,2679.98 U24.14@4097.58,2679.98
  Bottom Layer w5: v1(3256.91,2773.49) 3929.69,2773.49 v1(3988.51,2714.67) 3988.51,2699.67 v1(4033.51,2654.67)
NetU8_1: U8.1 U10.1 | length 459.5
  Top Layer w5: U8.1@2762.94,2497.72 2762.94,2509.41 2774.12,2520.58 2792.29,2538.76 2873.01,2538.76 2887.94,2523.83 2887.94,2471.6 2909.54,2450 2964.69,2450 U10.1@3046.91,2367.78 ; U10.1@3038.31,2382.45 3046.91,2373.84 U10.1@3046.91,2367.78 ; U10.1@3046.91,2335.76 U10.1@3046.91,2351.32 U10.1@3046.91,2367.78
NetU8_5: U8.5
PG: D7.2 U2.8 | length 171.8
  Top Layer w5: D7.2@3141.58,625.35 D7.2@3144.8,628.57 ; 3144.8,767.79 U2.8@3144.8,795.82
  Top Layer w10: D7.2@3144.8,628.57 3144.8,767.79
PGC: R53.2 U7.24 | length 88
  Top Layer w5: U7.24@3891.91,2689.67 3891.91,2717.17 3925.41,2750.67 3926.16,2750.67 3933.51,2758.02 R53.2@3933.51,2759.98
PGD: R54.2 U7.25 | length 82.7
  Top Layer w5: U7.25@3866.32,2689.67 3866.32,2737.07 3881.13,2751.88 3883.1,2751.88 3890.44,2759.22 R54.2@3890.44,2761.19
REGN: C25.2 D8.1 U2.18 | length 192.9
  Top Layer w20: 3257.92,928.62 3262.01,932.71 3262.01,1041.06 3268.74,1047.79 D8.1@3283.51,1047.79 3290.16,1047.79 3296.89,1054.52 C25.2@3296.89,1092.79
RXD: U8.4 U10.2 | length 294.6
  Top Layer w5: U8.4@2912.94,2497.72 2912.94,2492.09 2921.54,2483.48 2976.69,2483.48 3096.91,2363.26 U10.2@3096.91,2359.1 ; U10.2@3088.31,2367.71 U10.2@3096.91,2359.1 ; U10.2@3096.91,2323.76 U10.2@3096.91,2351.32 U10.2@3096.91,2359.1
SRN: C32.2 C33.2 C34.1 C35.1 F1.1 F1.2 P4.1 R16.2 R30.2 R31.2 U2.13 | length 2045.4
  Top Layer w20: U2.13@3245,820 3256.45,820 3283.35,793.11 3366.1,793.11 ; R31.2@3366.1,742.95 3366.1,793.11 ; R31.2@3366.26,742.79 C35.1@3366.26,697.79 3367.92,697.79 3400,665.71 v1(3400,660) ; C32.2@3601.73,773.26 C32.2@3601.58,773.42 ; v1(3790,675) 3795,680 3795,776.71 ; F1.1@4160,980 F1.2@4030,980 3826.71,776.71 3795,776.71 ; 3366.1,793.11 C34.1@3401.58,793.11 3401.58,791.45 3419.61,773.42 R30.2@3481.58,773.42 C32.2@3601.58,773.42 ; C32.2@3601.58,773.42 C33.2@3721.58,773.42 3724.87,776.71 3795,776.71
  Bottom Layer w10: R16.2@2797.56,455 3195,455 v1(3400,660)
  Bottom Layer w20: P4.1@3725.51,645 3725.51,659.41 3741.1,675 v1(3790,675)
SRP: C34.2 C36.1 L1.2 R30.1 U2.14 | length 487.2
  Top Layer w10: U2.14@3263.82,843.54 3283.14,843.54 3293.89,832.79 3296.58,832.79
  Top Layer w20: 3296.89,833.11 C36.1@3351.58,833.11 3351.58,832.63 3351.73,832.48 C34.2@3401.58,832.48 3401.58,834.13 3419.61,852.16 R30.1@3481.58,852.16 3481.58,941.58 3585,1045 L1.2@3605,1045
STAT1: D5.2 U2.5 | length 138.1
  Top Layer w5: U2.5@3093.2,843.59 3093.66,844.05 U2.5@3096.58,844.05
  Top Layer w10: D5.2@3014.14,757.79 3024.88,768.54 3024.88,775.28 3060,810.39 3060,837.68 3065.86,843.54 3093.14,843.54 U2.5@3093.2,843.59
STAT2: D6.2 U2.9 | length 185.8
  Top Layer w5: 3164.49,767.79 U2.9@3164.49,795.82
  Top Layer w9: 3164.49,767.79 3164.49,699.88 3201.58,662.79
  Top Layer w10: D6.2@3201.58,625.35 3201.58,662.79
TS: C24.2 R21.2 U2.6 | length 184.8
  Top Layer w10: C24.2@3001.26,707.79 3001.42,707.63 3051.42,707.63 R21.2@3051.58,707.48 3051.58,779.37 U2.6@3095.75,823.54
VBAT: R55.1 R56.2 U7.28 | length 150.9
  Top Layer w5: U7.28@3789.55,2689.67 3789.55,2703.67 3754.11,2739.11 3754.11,2758.75 R56.2@3753.19,2759.67 3757.15,2763.63 3757.15,2774.08 3782.28,2799.22 3782.28,2801.15 3789.63,2808.49 R55.1@3791.59,2808.49
VFB: C35.2 R31.1 R32.2 U2.12 | length 167.5
  Top Layer w20: 3229.38,795.3 3231.03,795.3 3285,741.34 R32.2@3285,739.69 ; R32.2@3285.16,740 3322.45,740 3325.24,742.79 R31.1@3326.89,742.79 C35.2@3326.89,697.79
VINS: C9.2 R4.1 R6.2 U1.7 | length 704.6
  Top Layer w5: U1.7@1175.62,1011.2 1175.62,1346.72 1229.5,1400.6 1313.5,1400.6 1358.34,1355.76 R6.2@1360.31,1355.76
  Top Layer w20: R6.2@1360.31,1355.76 1361.06,1356.51 C9.2@1431.46,1356.51 ; C9.2@1432.21,1357.26 1433.21,1358.26 1502.42,1358.26 R4.1@1503.42,1359.26
VOUTS: R49.1 R57.2 U1.5 | length 1748.5
  Top Layer w10: v1(1215,1080) 1226.8,1068.2 U1.5@1226.8,1011.2
  Bottom Layer w10: v1(1215,1080) 1448.16,1080 1720.66,807.5 1942.5,807.5 2069.97,680.03 2069.97,659 2227.61,501.36 2503.17,501.36 2547.56,456.97 R57.2@2547.56,455 R49.1@2617.44,455
VREC: C5.2 C6.2 C7.2 C8.2 D4.2 D9.1 D11.2 R4.2 R5.2 | length 1915.6
  Top Layer w20: R4.2@1503.42,1304.14 1504.32,1305.04 1582.09,1305.04 R5.2@1583,1305.95 1594.81,1305.95 1672.41,1228.35 1673.75,1228.35 ; D4.2@1648,1158.6 1648,1202.6 1673.75,1228.35 ; v1(2055,755) 2055,764.72 2094.85,804.57 C5.2@2094.85,834.1 C6.2@2094.85,969.1 2094.85,998.63 2128,1031.78 2128,1105.95 C7.2@2124.85,1109.1 C8.2@2124.85,1234.1 2116.52,1242.43 2113.2,1239.1 1783.5,1239.1 D11.2@1783,1238.6 1684,1238.6 1673.75,1228.35 ; v1(2485,545) D9.1@2598.07,545
  Bottom Layer w20: v1(2055,755) 2130.36,679.64 2130.36,626.89 2212.25,545 v1(2485,545)
VSENSE1: C54.1 R42.2 R44.2 U5.7 | length 562.3
  Top Layer w5: R44.2@949.84,2915.16 1002.83,2915.16 1287.99,2630 U5.7@1295.08,2630
  Top Layer w20: R42.2@904.69,2965 903.78,2965 903.62,2964.84 903.62,2916.06 C54.1@902.56,2915 902.72,2915.16 949.84,2915.16 R44.2@950,2915.31
VSENSE3: C40.1 R34.2 R36.2 U3.7 | length 577.3
  Bottom Layer w5: U3.7@1184.92,2520 1190.8,2520 1192.86,2522.05 1192.86,2525.52 1502.66,2835.31 R36.2@1520,2835.31
  Bottom Layer w20: R36.2@1520,2835.31 1520,2836.85 1520.16,2837.01 C40.1@1573.08,2837.01 1571.7,2838.39 1571.7,2889.84 1571.54,2890 R34.2@1570.31,2890
VSENSE5: C47.1 R38.2 R40.2 U4.7 | length 548.1
  Top Layer w5: 2185,2835 2185,2770.93 2426.36,2529.57 U4.7@2445.67,2529.57 ; R40.2@2210,2835.16 R40.2@2210,2835.31
  Top Layer w20: R38.2@2139.69,2895 2139.84,2894.84 2145.43,2894.84 2157.56,2882.72 C47.1@2157.56,2835 2185,2835 2209.84,2835 R40.2@2210,2835.16
VTANK: C3.1 C10.1 C13.1 P1.1 | length 732.7
  Top Layer w20: C13.1@1365.44,589.1 1365.44,541.38 1427.33,479.49 1602.47,479.49 C10.1@1603.42,478.55 C3.1@1688.42,478.55 ; C3.1@1688.42,479.22 1939.22,479.22 v1(1950,490)
  Bottom Layer w20: v1(1950,490) 1997.52,490 2013.11,474.41 P1.1@2013.11,474.02
pads on no net: J1.2 J1.3 J1.4 J1.5 J1.6 J1.7 J1.8 J1.9 J1.10 J1.11 J1.12 J1.13 J1.14 J1.15 J1.16 J1.17 J1.26 J1.27 J1.28 J1.29 J1.30 J1.31 J1.32 J1.33 J1.34 J1.35 J1.36 J1.37 J1.38 J1.39 P1.3 P1.4 P3.3 P3.4 P4.3 P4.4 P5.4 P5.5 U1.2 U1.6 U1.10 U1.14 U1.15 U2.3 U2.23 U3.10 U3.14 U4.10 U4.14 U5.10 U5.14 U6.8 U7.12 U7.13 U7.14 U7.15 U7.20 U7.22 U7.23 U10.3 U10.7 U10.8 U24.4 U24.9 U24.10 U24.11

## Polygon pours and split planes (outlines as drawn)
3V3 on Bottom Layer "3V3_L04_P007" (solid, pour order 7): 1033.56,2673.51 0.5,2673.51 0.5,389.5 4750.5,389.5 4750.5,3144.13 1033.56,3139.5
GND on Bottom Layer "GND_L04_P017" (solid, pour order 15): 0,2685 1025,2685 1025,3140 633.87,3139.5 0.5,3140 0.5,2685.5
5V0 on Top Layer "5V0_L01_P018" (solid, pour order 18): 0,3140 4750,3140 4750,390 0,390
NetC41_2 on Layer 2 (split plane): 2223.77,3139.5 2224.15,3135.58 2225.3,3131.81 2227.16,3128.34 2229.65,3125.29 2232.7,3122.79 2236.17,3120.94 2239.94,3119.79 2243.86,3119.41 4730.4,3119.41 4730.4,409.6 20.6,409.6 20.6,3119.41 633.87,3119.41 637.79,3119.79 641.56,3120.94 645.03,3122.79 648.08,3125.29 650.57,3128.34 652.43,3131.81 653.58,3135.58 653.96,3139.5 653.96,3619.41 1478.77,3619.41 1478.77,3139.5 1479.15,3135.58 1480.3,3131.81 1482.16,3128.34 1484.65,3125.29 1487.7,3122.79 1491.17,3120.94 1494.94,3119.79 1498.87,3119.41 1568.87,3119.41 1572.79,3119.79 1576.56,3120.94 1580.03,3122.79 1583.08,3125.29 1585.57,3128.34 1587.43,3131.81 1588.58,3135.58 1588.96,3139.5 1588.96,3619.41 2223.77,3619.41
GND on Layer 1 (split plane): 2223.77,3139.5 2224.15,3135.58 2225.3,3131.81 2227.16,3128.34 2229.65,3125.29 2232.7,3122.79 2236.17,3120.94 2239.94,3119.79 2243.86,3119.41 4730.4,3119.41 4730.4,409.6 20.6,409.6 20.6,3119.41 633.87,3119.41 637.79,3119.79 641.56,3120.94 645.03,3122.79 648.08,3125.29 650.57,3128.34 652.43,3131.81 653.58,3135.58 653.96,3139.5 653.96,3619.41 1478.77,3619.41 1478.77,3139.5 1479.15,3135.58 1480.3,3131.81 1482.16,3128.34 1484.65,3125.29 1487.7,3122.79 1491.17,3120.94 1494.94,3119.79 1498.87,3119.41 1568.87,3119.41 1572.79,3119.79 1576.56,3120.94 1580.03,3122.79 1583.08,3125.29 1585.57,3128.34 1587.43,3131.81 1588.58,3135.58 1588.96,3139.5 1588.96,3619.41 2223.77,3619.41

## Keep-outs
Keep-Out Layer:
  rectangle: 0,390 350,3140
  rectangle: 4400,390 4750,3140

## Silkscreen, mask and mechanical layers (free items; w line width, h text height)
Top Solder:
  rectangle: 1290,2515 1420,2680
  rectangle: 3230,935 3330,1010
  rectangle: 2915,895 2995,935
  rectangle: 1925,1310 1975,1410
  rectangle: 3080,1210 3130,1310
  rectangle: 3235,1220 3345,1275
  rectangle: 3075,815 3105,935
  rectangle: 3080,775 3275,970
  rectangle: 1090,830 1295,1035
  rectangle: 1220,1630 1385,1730
  rectangle: 2430,2420 2585,2580
  rectangle: 3775,2445 3960,2505
  rectangle: 3945,2485 4005,2670
  rectangle: 3765,2660 3960,2715
  rectangle: 3730,2485 3795,2670
  rectangle: 4070,2625 4200,2775
Bottom Solder:
  rectangle: 1045,2435 1090,2535
  rectangle: 1070,2400 1175,2570

## Text inside footprints (layer, text, board x,y; h text height)
D4: Mechanical 13 "*" at 1673,993.6 h50 r90; Mechanical 7 "0.146in/3.708mm" at 1842,975.35 h25 r90; Mechanical 7 "0.098in/2.489mm" at 1660.5,1362.1 h25 r90; Mechanical 7 "0.059in/1.499mm" at 1660.5,1284.6 h25 r90; Mechanical 7 "0.02in/0.508mm" at 1548.5,896.1 h25 r90; Mechanical 7 "0.191in/4.851mm" at 1448.5,975.35 h25 r90; Mechanical 7 "Alt 2 Padstyle: OX90Y60D30P" at 2152.5,731.6 h50 r90; Mechanical 7 "Alt 1 Padstyle: OX60Y90D30P" at 2077.5,731.6 h50 r90; Mechanical 7 "Default Padstyle: RX28Y59D0T" at 2002.5,719.1 h50 r90
D11: Mechanical 13 "*" at 1808,1073.6 h50 r90; Mechanical 7 "0.146in/3.708mm" at 1977,1055.35 h25 r90; Mechanical 7 "0.098in/2.489mm" at 1795.5,1442.1 h25 r90; Mechanical 7 "0.059in/1.499mm" at 1795.5,1364.6 h25 r90; Mechanical 7 "0.02in/0.508mm" at 1683.5,976.1 h25 r90; Mechanical 7 "0.191in/4.851mm" at 1583.5,1055.35 h25 r90; Mechanical 7 "Alt 2 Padstyle: OX90Y60D30P" at 2287.5,811.6 h50 r90; Mechanical 7 "Alt 1 Padstyle: OX60Y90D30P" at 2212.5,811.6 h50 r90; Mechanical 7 "Default Padstyle: RX28Y59D0T" at 2137.5,799.1 h50 r90
D12: Mechanical 13 "*" at 1728.5,859.1 h50 r180; Mechanical 7 "0.146in/3.708mm" at 1746.75,1028.1 h25 r180; Mechanical 7 "0.098in/2.489mm" at 1360,846.6 h25 r180; Mechanical 7 "0.059in/1.499mm" at 1437.5,846.6 h25 r180; Mechanical 7 "0.02in/0.508mm" at 1826,734.6 h25 r180; Mechanical 7 "0.191in/4.851mm" at 1746.75,634.6 h25 r180; Mechanical 7 "Alt 2 Padstyle: OX90Y60D30P" at 1990.5,1338.6 h50 r180; Mechanical 7 "Alt 1 Padstyle: OX60Y90D30P" at 1990.5,1263.6 h50 r180; Mechanical 7 "Default Padstyle: RX28Y59D0T" at 2003,1188.6 h50 r180
D13: Mechanical 13 "*" at 1822.5,809.1 h50; Mechanical 7 "0.146in/3.708mm" at 1804.25,640.1 h25; Mechanical 7 "0.098in/2.489mm" at 2191,821.6 h25; Mechanical 7 "0.059in/1.499mm" at 2113.5,821.6 h25; Mechanical 7 "0.02in/0.508mm" at 1725,933.6 h25; Mechanical 7 "0.191in/4.851mm" at 1804.25,1033.6 h25; Mechanical 7 "Alt 2 Padstyle: OX90Y60D30P" at 1560.5,329.6 h50; Mechanical 7 "Alt 1 Padstyle: OX60Y90D30P" at 1560.5,404.6 h50; Mechanical 7 "Default Padstyle: RX28Y59D0T" at 1548,479.6 h50
Q1: Mechanical 7 "0.068in/1.727mm" at 3142.75,1472 h25 r180; Mechanical 7 "0.124in/3.15mm" at 3132.5,1572 h25 r180; Mechanical 7 "0.134in/3.404mm" at 2865.5,1272.5 h25 r180; Mechanical 7 "0.026in/0.65mm" at 3399.5,1246.91 h25 r180; Mechanical 7 "0.022in/0.559mm" at 3194.75,1101.61 h25 r180; Mechanical 7 "0.134in/3.404mm" at 3138.75,951.61 h25 r180; Mechanical 7 "Alt 2 Padstyle: OX90Y60D30P" at 3382.5,1852 h50 r180; Mechanical 7 "Alt 1 Padstyle: OX60Y90D30P" at 3382.5,1777 h50 r180; Mechanical 7 "Default Padstyle: RX39Y16D0T" at 3395,1702 h50 r180
Q2: Mechanical 7 "0.068in/1.727mm" at 3497,1212.25 h25 r90; Mechanical 7 "0.124in/3.15mm" at 3597,1222.5 h25 r90; Mechanical 7 "0.134in/3.404mm" at 3297.5,1489.5 h25 r90; Mechanical 7 "0.026in/0.65mm" at 3271.91,955.5 h25 r90; Mechanical 7 "0.022in/0.559mm" at 3126.61,1160.25 h25 r90; Mechanical 7 "0.134in/3.404mm" at 2976.61,1216.25 h25 r90; Mechanical 7 "Alt 2 Padstyle: OX90Y60D30P" at 3877,972.5 h50 r90; Mechanical 7 "Alt 1 Padstyle: OX60Y90D30P" at 3802,972.5 h50 r90; Mechanical 7 "Default Padstyle: RX39Y16D0T" at 3727,960 h50 r90
U1: Mechanical 13 "*" at 1259.42,910.52 h50 r180; Mechanical 7 "0.157in/3.988mm" at 1282.17,1191.2 h25 r180; Mechanical 7 "0.157in/3.988mm" at 1605.42,949.2 h25 r180; Mechanical 7 "0.157in/3.988mm" at 908.92,949.2 h25 r180; Mechanical 7 "0.157in/3.988mm" at 1282.17,657.2 h25 r180; Mechanical 7 "0.02in/0.508mm" at 1207.42,732.2 h25 r180; Mechanical 7 "0.026in/0.65mm" at 983.92,923.61 h25 r180; Mechanical 7 "Alt 2 Padstyle: OX90Y60D30P" at 1525.92,1577.2 h50 r180; Mechanical 7 "Alt 1 Padstyle: OX60Y90D30P" at 1525.92,1517.2 h50 r180; Mechanical 7 "Heat Tab Padstyle: RX106Y106D0T" at 1575.92,1397.2 h50 r180; Mechanical 7 "Default Padstyle: RX12Y32D0T" at 1538.42,1337.2 h50 r180
U2: Mechanical 1 "*" at 3123.31,932.63 h31.25; Top Component Center "Default Padstyle: RX11p02Y33p46D0T" at 3174.33,585.98 h31.25; Top Component Center "Heat Tab Padstyle: RX96p46Y96p46D0T" at 3174.33,525.98 h31.25; Top Component Center "Via Padstyle: EX20Y20D10P" at 3174.33,465.98 h31.25; Top Component Center "Alt 1 Padstyle: OX60Y90D30P" at 3174.33,405.98 h31.25; Top Component Center "Alt 2 Padstyle: OX90Y60D30P" at 3174.33,345.98 h31.25; Top Component Center "0.02in/0.5mm" at 3381.93,912.95 h15.62; Top Component Center "0.02in/0.5mm" at 3246.18,1081.18 h15.62; Top Component Center "0.156in/3.95mm" at 3174.33,1156.18 h15.62; Top Component Center "0.156in/3.95mm" at 3456.93,873.58 h15.62; Top Component Center "0.163in/4.15mm" at 2941.73,873.58 h15.62; Top Component Center "0.163in/4.15mm" at 3174.33,640.98 h15.62
U6: Top Overlay "*" at 1234.31,1777.78 h31.25; Mechanical 1 "*" at 1249.58,1732.78 h31.25; Top Component Center "Default Padstyle: RX33p46Y13p78D0T" at 1301.59,1468.61 h31.25; Top Component Center "Pin One Padstyle: EX33p46Y13p78D0T" at 1301.59,1408.61 h31.25; Top Component Center "Heat Tab Padstyle: RX62p99Y94p49D0T" at 1301.59,1348.61 h31.25; Top Component Center "Via Padstyle: EX20Y20D10P" at 1301.59,1288.61 h31.25; Top Component Center "Alt 1 Padstyle: OX60Y90D30P" at 1301.59,1228.61 h31.25; Top Component Center "Alt 2 Padstyle: OX90Y60D30P" at 1301.59,1168.61 h31.25; Top Component Center "0.124in/3.15mm" at 1301.59,1837.62 h15.62; Top Component Center "0.124in/3.15mm" at 1301.59,1912.62 h15.62; Top Component Center "0.124in/3.15mm" at 1483.6,1680.61 h15.62; Top Component Center "0.026in/0.65mm" at 1124.31,1706.2 h15.62; Top Component Center "0.02in/0.5mm" at 1249.43,1523.61 h15.62
U7: Top Overlay "*" at 3711.32,2669.24 h31.25; Mechanical 1 "*" at 3776.32,2669.24 h31.25; Top Component Center "Default Padstyle: RX12Y40D0T" at 3866.32,2189.67 h31.25; Top Component Center "Heat Tab Padstyle: RX165Y165D0T" at 3866.32,2129.67 h31.25; Top Component Center "Alt 1 Padstyle: OX60Y90D30P" at 3866.32,2009.67 h31.25; Top Component Center "Alt 2 Padstyle: OX90Y60D30P" at 3866.32,1949.67 h31.25; Top Component Center "0.026in/0.65mm" at 4110.32,2643.65 h15.62; Top Component Center "0.028in/0.711mm" at 3970.32,2823.67 h15.62; Top Component Center "0.236in/5.994mm" at 3866.32,2898.67 h15.62; Top Component Center "0.236in/5.994mm" at 4185.32,2579.67 h15.62; Top Component Center "0.236in/5.994mm" at 3597.32,2579.67 h15.62; Top Component Center "0.236in/5.994mm" at 3866.32,2310.67 h15.62